# EAGLE board Projeto_SI_PG (EAGLE 9.7.0)

Size 308.33 x 187.74 mm. Coordinates in mm from the lower left corner, seen from the top.
Outline: 0,0 308.33,0 308.33,187.74 0,187.74 0,0
Copper layers (1*16): Top 0.035mm / dielectric 1.5mm / Bottom 0.035mm
Design rules "default": minimum track width 6mil, minimum drill 0.35mm, track to track 6mil, track to pad 6mil, pad to pad 6mil, via to via 6mil, smd to smd 6mil, copper to edge 40mil, drill to drill 6mil, minimum pad ring 10mil, minimum via ring 8mil, stop-mask expansion 4mil, vias tented up to drill 0mil, thermal gap 10mil

## Footprints (pad centres in the part's own frame; a part is rotated, then mirrored left to right if it is on the bottom)
LEDRD254W60D565H860B = drill 0.981 pad 1.581: 1 -1.27,0; 2 1.27,0
HC-SR04 = drill 1.016 long: 1 -3.81,0; 2 -1.27,0; 3 1.27,0; 4 3.81,0
PIEZO = drill 1 pad 1.6: 1 -3.5,0; 2 3.5,0
RESAD1016W63L850D250B = drill 0.83 pad 1.43: 1 -5.08,0; 2 5.08,0
SG90 = drill 1.016 long: 1 -2.54,0; 2 0,0; 3 2.54,0
ARDUINO-UNO-R3-SHIELD = drill 1.016 pad 1.88: 3.3V 24.13,-2.54; 5V 24.13,0; A0 24.13,12.7; A1 24.13,15.24; A2 24.13,17.78; A3 24.13,20.32; A4 24.13,22.86; A5 24.13,25.4; AREF -24.13,-13.97; D2 -24.13,20.32; D3 -24.13,17.78; D4 -24.13,15.24; D5 -24.13,12.7; D6 -24.13,10.16; D7 -24.13,7.62; D8 -24.13,3.81; D9 -24.13,1.27; D10 -24.13,-1.27; D11 -24.13,-3.81; D12 -24.13,-6.35; D13 -24.13,-8.89; GND@0 24.13,2.54; GND@1 24.13,5.08; GND@2 -24.13,-11.43; IOREF 24.13,-7.62; NC 24.13,-10.16; RES 24.13,-5.08; RX -24.13,25.4; SCL -24.13,-19.05; SDA -24.13,-16.51; TX -24.13,22.86; VIN 24.13,7.62
LCD-I2C = drill 1.016 long: 1 -19.05,-5.08; 2 -19.05,-7.62; 3 -19.05,-10.16; 4 -19.05,-12.7

## Placement (x,y rotation side)
D8  RED  [LEDRD254W60D565H860B]  106.47,100.53 180 top
D11  RED  [LEDRD254W60D565H860B]  164.89,100.53 180 top
DIST4  DISTANCE-SENSOR-4PINHC-SR04  [HC-SR04]  26.04,136.57 0 top
DIST5  DISTANCE-SENSOR-4PINHC-SR04  [HC-SR04]  282.3,132.4 0 top
PIEZO3  PIEZO  [PIEZO]  164.89,80.21 0 top
R10  220  [RESAD1016W63L850D250B]  107.74,87.83 90 top
R13  220  [RESAD1016W63L850D250B]  166.16,87.83 90 top
SERVO3  SERVOSG90  [SG90]  24.95,107.69 0 top
SERVO4  SERVOSG90  [SG90]  284.45,107.92 0 top
U3  ARDUINO-UNO-R3-SHIELD  [ARDUINO-UNO-R3-SHIELD]  134.41,29.84 270 top
U4  LCD-16X2-I2CSUNFOUNDER-IIC  [LCD-I2C]  133.38,180.19 0 top

## Library data of the parts
D8 D11 = Tinkercad; CATEGORY: Opto-Electronic; SUB-CATEGORY: LED; VALUE: LED_RED
DIST4 DIST5 PIEZO3 R10 R13 SERVO3 SERVO4 U3 U4 = Tinkercad

## Nets
D8_A: D8.1 R10.2
D11_A: D11.1 R13.2
U3_5V: DIST4.1 DIST5.1 SERVO3.2 SERVO4.2 U3.5V U4.2
U3_D2: PIEZO3.1 U3.D2
U3_D3: SERVO4.3 U3.D3
U3_D4: R13.1 U3.D4
U3_D6: DIST5.3 U3.D6
U3_D7: DIST5.2 U3.D7
U3_D9: DIST4.3 U3.D9
U3_D10: DIST4.2 U3.D10
U3_D12: R10.1 U3.D12
U3_D13: SERVO3.3 U3.D13
U3_GND: D8.2 D11.2 DIST4.4 DIST5.4 PIEZO3.2 SERVO3.1 SERVO4.1 U3.GND@0 U3.GND@1 U3.GND@2 U4.1
U3_SCL: U3.SCL U4.4
U3_SDA: U3.SDA U4.3

## Tracks (layer width: path | path; a pad name or v marks a point on that pad's centre or on a via)
D8_A  (1 unrouted)
D11_A  (1 unrouted)
U3_5V  (5 unrouted)
U3_D2  (1 unrouted)
U3_D3  (1 unrouted)
U3_D4  (1 unrouted)
U3_D6  (1 unrouted)
U3_D7  (1 unrouted)
U3_D9  (1 unrouted)
U3_D10  (1 unrouted)
U3_D12  (1 unrouted)
U3_D13  (1 unrouted)
U3_GND  (10 unrouted)
U3_SCL  (1 unrouted)
U3_SDA  (1 unrouted)